# Altium PCB PCB_TTL.PcbDoc
Units mil, origin at the board's own origin, x right, y up, seen from the top; angles counter-clockwise.
Board outline 6000 x 4000 mil, 2 copper layers (Top Layer, Bottom Layer); 60 components, 136 nets, 462 pads, 29 vias.
Unrouted connection lines stored in the file: 2.
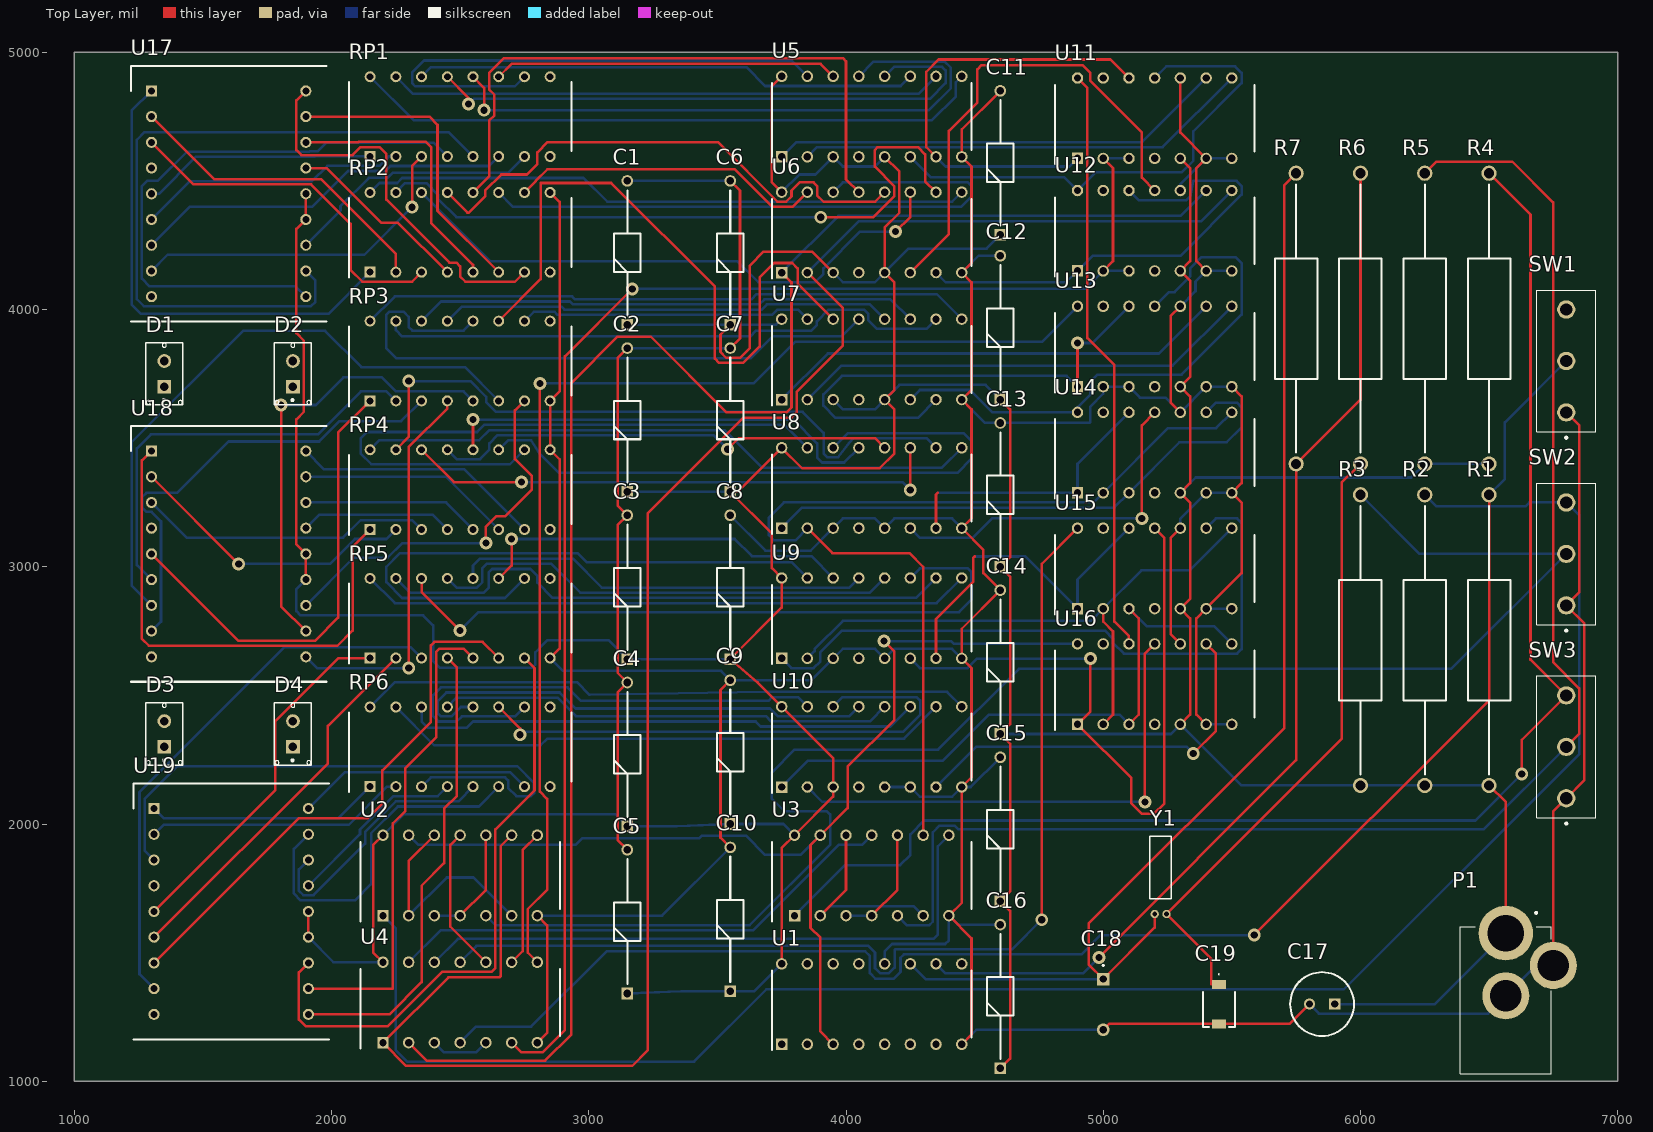
[diagram p0: Top Layer view]
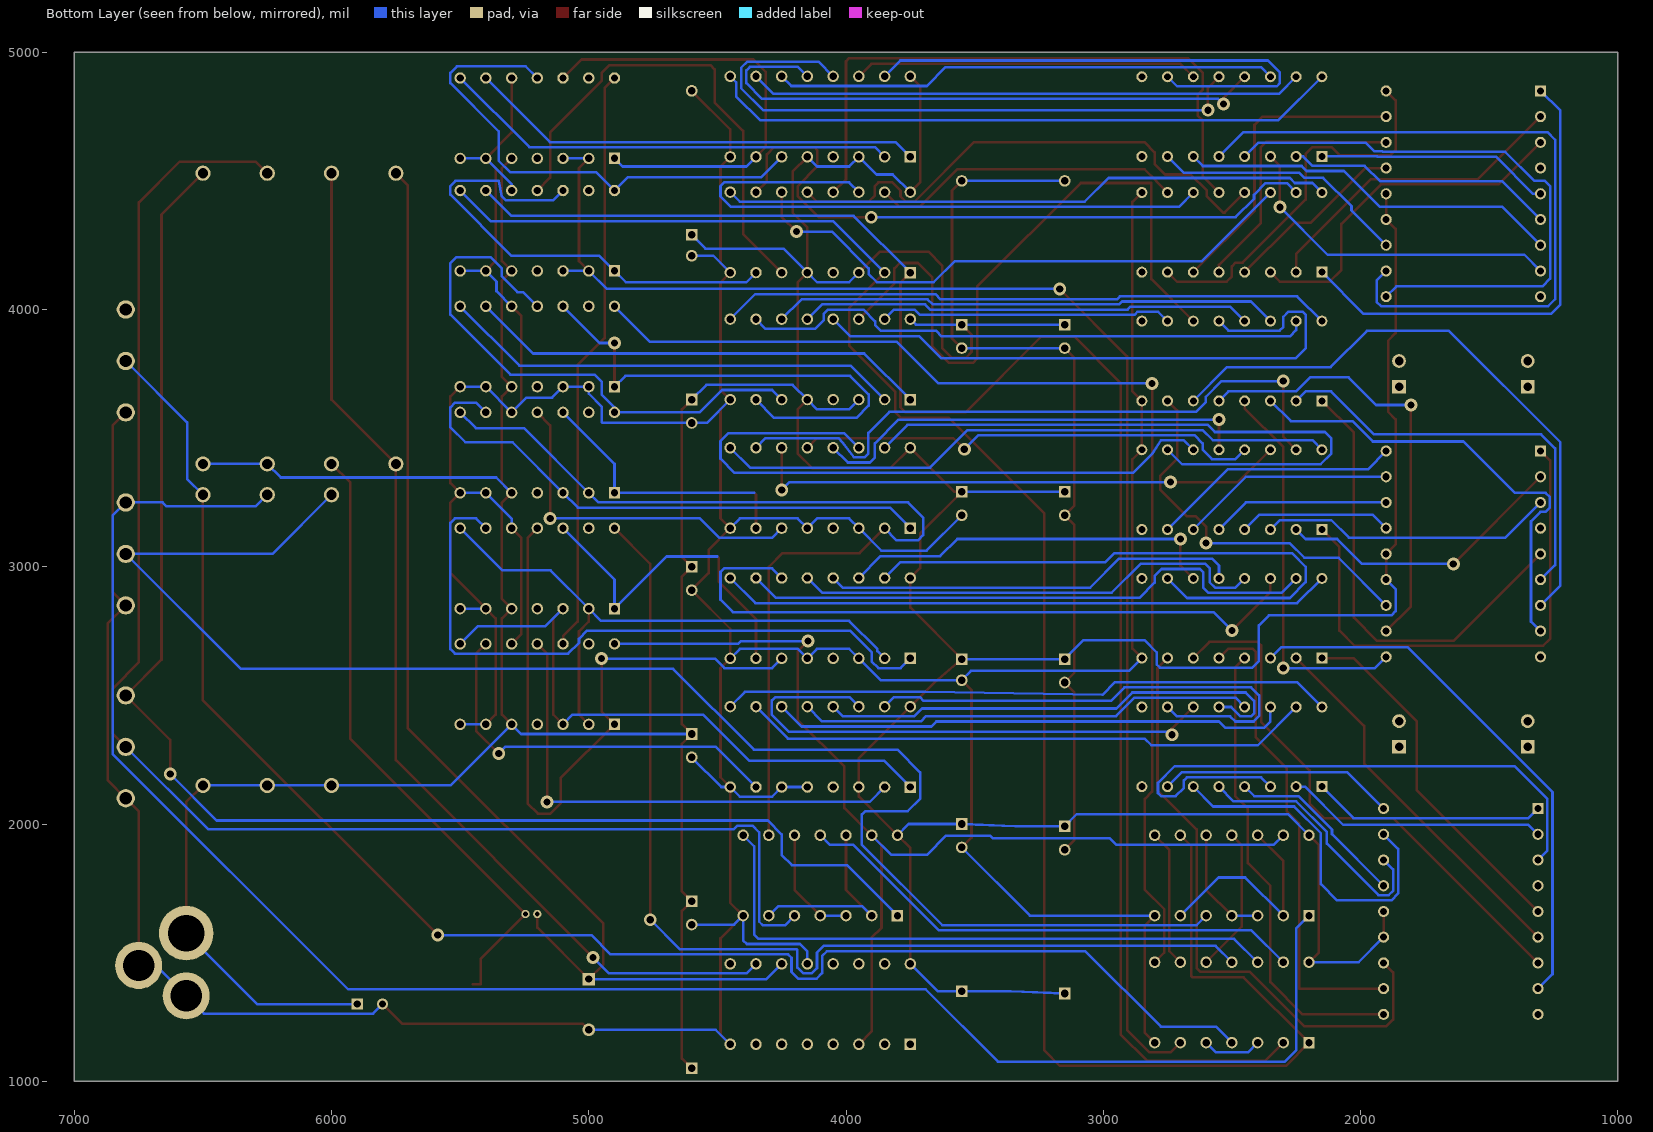
[diagram p1: Bottom Layer view, seen from below]

## Layer stack, top to bottom
Top Solder: solder mask 0.4, Solder Resist, Dk 3.5
Top Layer: signal copper 1.4
Dielectric 1: dielectric 12.6, FR-4, Dk 4.8
Bottom Layer: signal copper 1.4
Bottom Solder: solder mask 0.4, Solder Resist, Dk 3.5

## Board outline
1000,1000 7000,1000 7000,5000 1000,5000

## Design rules (kind name [scope] priority, off if disabled: settings)
Clearance [All] p1: gap=10 ignorepadtopadclearanceinfootprint=FALSE
PolygonConnect [All] p1: connectstyle=Relief reliefconductorwidth=10 reliefentries=4 polygonreliefangle="90 Angle" airgapwidth=10
RoutingVias [All] p1: holewidth=28 width=50 viastyle="Through Hole" minholewidth=28 minwidth=50 maxholewidth=28 maxwidth=50
SolderMaskExpansion [All] p1: expansion=0 istentingtop=FALSE
SupplyNets "Schematic Supply Nets_1" [InNet('GND')] p1: voltage=0.000
SupplyNets "Schematic Supply Nets" [InNet('VCC')] p2: voltage=0.000
Width [All] p1: maxlimit=10 minlimit=10 preferedwidth=10
30 further rules are at their usual default settings.

## Components (designator, comment, footprint, x,y, rotation, side; value= is the part's Value field where it differs from the comment)
C1 "100nF" CAPPA1420W55L380D260 3150,3940.94 r90 top
C2 "100nF" CAPPA1420W55L380D260 3150,3290.94 r90 top
C3 "100nF" CAPPA1420W55L380D260 3150,2640.94 r90 top
C4 "100nF" CAPPA1420W55L380D260 3150,1990.94 r90 top
C5 "100nF" CAPPA1420W55L380D260 3150,1340.94 r90 top
C6 "100nF" CAPPA1420W55L380D260 3550,3940.94 r90 top
C7 "100nF" CAPPA1420W55L380D260 3550,3290.94 r90 top
C8 "100nF" CAPPA1420W55L380D260 3550,2640.94 r90 top
C9 "100nF" CAPPA1420W55L380D260 3550,2000 r90 top
C10 "100nF" CAPPA1420W55L380D260 3550,1350 r90 top
C11 "100nF" CAPPA1420W55L380D260 4600,4290.94 r90 top
C12 "100nF" CAPPA1420W55L380D260 4600,3650 r90 top
C13 "100nF" CAPPA1420W55L380D260 4600,3000 r90 top
C14 "100nF" CAPPA1420W55L380D260 4600,2350 r90 top
C15 "100nF" CAPPA1420W55L380D260 4600,1700 r90 top
C16 "100nF" CAPPA1420W55L380D260 4600,1050 r90 top
C17 "100nF" CAPPRD250W52D630H1250 5900,1300 r180 top
C18 "12pF" FG28 5000,1396.85 r270 top
C19 "5-30pF" JZ300 5450,1300 r270 top
D1 "LED" LED_SSL-LX4673GD-LA20 1350,3750 r90 top
D2 "LED" LED_SSL-LX4673GD-LA20 1850,3750 r90 top
D3 "LED" LED_SSL-LX4673GD-LA20 1350,2350 r90 top
D4 "LED" LED_SSL-LX4673GD-LA20 1850,2350 r90 top
P1 "5V" KLDX0202A 6564.96,1575.98 r90 top
R1 "4.7K" RESAD2870W80L1190D420 6500,2150 r90 top
R2 "4.7k" RESAD2870W80L1190D420 6250,2150 r90 top
R3 "4.7k" RESAD2870W80L1190D420 6000,2150 r90 top
R4 "4.7k" RESAD2870W80L1190D420 6500,3400 r90 top
R5 "4.7k" RESAD2870W80L1190D420 6250,3400 r90 top
R6 "330K" RESAD2870W80L1190D420 6000,4529.92 r270 top
R7 "15M" RESAD2870W80L1190D420 5750,3400 r90 top
RP1 "R_Pack08" DIP787W49P254L2197H469Q16N 2500,4750 r90 top
RP2 "R_Pack08" DIP787W49P254L2197H469Q16N 2500,4300 r90 top
RP3 "R_Pack08" DIP787W49P254L2197H469Q16N 2500,3800 r90 top
RP4 "R_Pack08" DIP787W49P254L2197H469Q16N 2500,3300 r90 top
RP5 "R_Pack08" DIP787W49P254L2197H469Q16N 2500,2800 r90 top
RP6 "R_Pack08" DIP787W49P254L2197H469Q16N 2500,2300 r90 top
SW1 "Seconden" SS0750301F040P1A 6800,3600 r90 top
SW2 "Minuten" SS0750301F040P1A 6800,2850 r90 top
SW3 "Uren" SS0750301F040P1A 6800,2100 r90 top
U1 "74HCT4060" DIP794W53P254L1930H508Q16N 4100,1300 r90 top
U2 "74LS00" DIP794W53P254L1930H508Q14N 2500,1800 r90 top
U3 "74LS00" DIP794W53P254L1930H508Q14N 4100,1800 r90 top
U4 "74LS00" DIP794W53P254L1930H508Q14N 2500,1306.3 r90 top
U5 "74LS47" DIP794W53P254L1930H508Q16N 4100,4750 r90 top
U6 "74LS47" DIP794W53P254L1930H508Q16N 4100,4300 r90 top
U7 "74LS47" DIP794W53P254L1930H508Q16N 4100,3806.3 r90 top
U8 "74LS47" DIP794W53P254L1930H508Q16N 4100,3306.3 r90 top
U9 "74LS47" DIP794W53P254L1930H508Q16N 4100,2800 r90 top
U10 "74LS47" DIP794W53P254L1930H508Q16N 4100,2300 r90 top
U11 "74LS90" DIP794W53P254L1930H508Q14N 5200,4743.7 r90 top
U12 "74LS90" DIP794W53P254L1930H508Q14N 5200,4306.3 r90 top
U13 "74LS90" DIP794W53P254L1930H508Q14N 5200,3856.3 r90 top
U14 "74LS90" DIP794W53P254L1930H508Q14N 5200,3443.7 r90 top
U15 "74LS90" DIP794W53P254L1930H508Q14N 5200,2993.7 r90 top
U16 "74LS90" DIP794W53P254L1930H508Q14N 5200,2543.7 r90 top
U17 "DA56-11SRWA" DIPS1524W50P254L2500H825Q18N 1300,4850 r0 top
U18 "DA56-11SRWA" DIPS1524W50P254L2500H825Q18N 1300,3450 r0 top
U19 "DA56-11SRWA" DIPS1524W50P254L2500H825Q18N 1310,2060 r0 top
Y1 "32768Hz" XTAL_AB26T-32.768KHZ 5223.03,1650 r270 top

## Footprints (in the part's own frame and the unit in brackets; to place one, negate y for a bottom-side part, rotate by r counter-clockwise, add the part's x,y. Pads: shape width x height; smd on the part's side, far side on the other; paste and mask are expansions set on the pad)
CAPPA1420W55L380D260 [mm]
  rect 1.15x1.15 / inner round 1.15 / far side rect 1.15x1.15 hole 0.75: 1(0,0)
  round 1.15 hole 0.75: 2(14.2,0)
  silkscreen extent 0.92,-1.3 13.27,1.3
CAPPRD250W52D630H1250 [mm]
  rect 1.1x1.1 / inner round 1.1 / far side rect 1.1x1.1 hole 0.7: 1(0,0)
  round 1.1 hole 0.7: 2(2.5,0)
  silkscreen extent -1.9,-3.15 4.4,3.15
DIP787W49P254L2197H469Q16N [mm]
  rect 1.088x1.088 / inner round 1.088 / far side rect 1.088x1.088 hole 0.688: 1(-3.935,8.89)
  round 1.088 hole 0.688: 2(-3.935,6.35) 3(-3.935,3.81) 4(-3.935,1.27) 5(-3.935,-1.27) 6(-3.935,-3.81) 7(-3.935,-6.35) 8(-3.935,-8.89) 9(3.935,-8.89) 10(3.935,-6.35) 11(3.935,-3.81) 12(3.935,-1.27) 13(3.935,1.27) 14(3.935,3.81) 15(3.935,6.35) 16(3.935,8.89)
  silkscreen extent -4.48,-10.98 3.41,10.98
DIP794W53P254L1930H508Q14N [mm]
  rect 1.13x1.13 / inner round 1.13 / far side rect 1.13x1.13 hole 0.73: 1(-3.97,7.62)
  round 1.13 hole 0.73: 2(-3.97,5.08) 3(-3.97,2.54) 4(-3.97,0) 5(-3.97,-2.54) 6(-3.97,-5.08) 7(-3.97,-7.62) 8(3.97,-7.62) 9(3.97,-5.08) 10(3.97,-2.54) 11(3.97,0) 12(3.97,2.54) 13(3.97,5.08) 14(3.97,7.62)
  silkscreen extent -4.54,-9.84 3.3,9.84
DIP794W53P254L1930H508Q16N [mm]
  rect 1.13x1.13 / inner round 1.13 / far side rect 1.13x1.13 hole 0.73: 1(-3.97,8.89)
  round 1.13 hole 0.73: 2(-3.97,6.35) 3(-3.97,3.81) 4(-3.97,1.27) 5(-3.97,-1.27) 6(-3.97,-3.81) 7(-3.97,-6.35) 8(-3.97,-8.89) 9(3.97,-8.89) 10(3.97,-6.35) 11(3.97,-3.81) 12(3.97,-1.27) 13(3.97,1.27) 14(3.97,3.81) 15(3.97,6.35) 16(3.97,8.89)
  silkscreen extent -4.54,-9.84 3.3,9.84
DIPS1524W50P254L2500H825Q18N [mm]
  rect 1.1x1.1 / inner round 1.1 / far side rect 1.1x1.1 hole 0.7: 1(0,0)
  round 1.1 hole 0.7: 2(0,-2.54) 3(0,-5.08) 4(0,-7.62) 5(0,-10.16) 6(0,-12.7) 7(0,-15.24) 8(0,-17.78) 9(0,-20.32) 10(15.24,-20.32) 11(15.24,-17.78) 12(15.24,-15.24) 13(15.24,-12.7) 14(15.24,-10.16) 15(15.24,-7.62) 16(15.24,-5.08) 17(15.24,-2.54) 18(15.24,0)
  silkscreen extent -2.03,-22.79 17.27,2.47
FG28 [mm]
  rect 1.25x1.25 hole 0.7: 1(0,0)
  round 1.25 hole 0.7: 2(5,0)
  silkscreen extent -1.4,-0.05 -1.3,0.05, body extent -0.29,-1.25 5.21,1.25, height 6.48
JZ300 [mm]
  rect 0.9x1.4 smd: 1(-1.95,0) 2(1.95,0)
  silkscreen extent -3,-1.6 2.25,1.6
KLDX0202A [mm]
  round 5.385 hole 3.59: 1(0,0)
  round 4.65 hole 3.1: 2(-6.2,0) 3(-3.2,-4.7)
  silkscreen extent -13.9,-4.5 2.1,4.5
LED_SSL-LX4673GD-LA20 [mm]
  rect 1.358x1.358 / inner round 1.358 / far side rect 1.358x1.358 hole 0.85 mask+0.102: A(-1.27,0)
  round 1.358 hole 0.85 mask+0.102: C(1.27,0)
  silkscreen extent -3.07,-1.82 3.08,1.82
RESAD2870W80L1190D420 [mm]
  round 1.5 hole 1: 1(0,0) 2(28.7,0)
  silkscreen extent 1.1,-2.1 27.6,2.1
SS0750301F040P1A [mm]
  round 1.8 hole 1.2: 1(0,0) 2(5.08,0) 3(10.16,0)
  silkscreen extent -2.6,-2.9 12.08,2.9
XTAL_AB26T-32.768KHZ [mm]
  round 0.81 hole 0.46 mask+0.102: 1(0,0.585) 2(0,-0.585)
  silkscreen extent -7.7,-1.05 -1.5,1.05, body extent -7.7,-1.05 0.13,1.05, height 2.1

## Part data
C1 C2 C3 C4 C5 C6 C7 C8 C9 C10 C11 C12 C13 C14 C15 C16 C18: library part C
C17: library part CP1
C19: library part CTRIM
P1: library part Barrel_Jack_Switch
R1 R2 R3 R4 R5 R6 R7: library part R
SW1 SW2 SW3: library part SW_SPDT_Omron
Y1: library part Crystal

## Via types
v1: diameter 50, hole 28, Top Layer to Bottom Layer, 29 vias

## Nets (pads, with @x,y where several pads share a name; then routed paths per layer and width w, separated by ;. In a path a pad name is that pad's centre, name@x,y a point inside that pad or via, vN(x,y) a via of type N, cw(c..) or ccw(c..) an arc to the next point about the centre after c; other vN are vias at no path point)
GND: C8.2 C9.2 C10.2 C11.2 C12.2 C13.2 C14.2 C15.2 C16.2 C17.2 C18.2 C19.2 P1.2 P1.3 RP2.9 RP3.8 RP4.9 RP5.8 SW1.1 SW2.1 SW3.1 U1.8 U1.12 U2.7 U3.7 U4.7 U5.8 U6.8 U7.8 U8.3 U8.5 U8.8 U9.3 U9.5 U9.8 U10.5 U10.6 U10.8 U11.6 U11.7 U11.10 U12.6 U12.7 U12.10 U13.2 U13.3 U13.6 U13.7 U13.10 U14.6 U14.7 U14.10 U15.6 U15.7 U15.10 U16.6 U16.7 U16.10 | length 22379.7
  Top Layer w10: U4.7 2838,1188 2838,1605.7 U2.7 ; RP5.8 2887,2682.08 2887,3417.92 RP4.9 RP3.8 2887,3682.08 2887,4417.92 RP2.9 ; C10.2 3512,1947.06 3512,2521.06 C9.2 ; U1.8 4488,1181.7 4488,1555.7 U3.7 4450,1693.7 U10.8 4488,2181.7 4488,2605.7 U9.8 4450,2759.06 C14.2 4534,2975.06 4534,3066 U8.8 4488,3188 4488,3612 U7.8 4488,3688 4488,4105.7 U6.8 4488,4181.7 4488,4555.7 U5.8 4450,4700 C11.2 ; C18.2 5023.23,1223.23 C19.2 5724.8,1223.23 C17.2 ; U16.10 5262,2738 5262,3112 U15.10 ; U14.10 5262,3638 5262,3974.6 U13.10 ; U11.10 5300,4687.4 U11.6 5362,4549.4 5362,4188 U12.6 ; U16.6 5362,2425.4 5362,2799.4 U15.6 5538,2975.4 5538,3249.4 U14.7 5538,3325.4 5538,3662 U13.7 ; P1.3 6750,2050 SW3.1 6870.43,2170.43 6870.43,2779.57 SW2.1 6851,2901 6851,3549 SW1.1
  Bottom Layer w10: U2.7 3284.64,1643.7 C10.2 ; RP5.8 2900.08,2595 3514.06,2595 C9.2 3865.36,2559.06 U9.3 3987.3,2681 4112.7,2681 U9.5 4187.3,2681 4412.7,2681 U9.8 ; C8.2 3687,3063 3863,3063 U8.3 3988,3188 4112,3188 U8.5 4188,3188 4412,3188 U8.8 ; U1.12 4150,1504.15 4179.4,1533.55 4385.55,1533.55 4400,1548 U3.7 4434.64,1609.06 C16.2 ; U10.5 U10.6 4287.7,2106 4412.3,2106 U10.8 4484.64,2143.7 C15.2 ; U1.8 4506.3,1200 C18.2 ; U7.8 4540.94,3559.06 C13.2 4947.06,3559.06 4950,3562 4950,3622.75 5000,3672.75 U13.2 U13.3 5142.75,3657.25 5242.75,3657.25 U14.10 U13.6 U13.7 ; U6.8 4515.36,4209.06 C12.2 ; U15.10 5300,3187.4 U14.6 U14.7 ; U13.10 5358.64,4071.24 5358.64,4108.64 U12.6 U12.7 ; U12.10 5300,4487.4 U11.6 U11.7 ; U16.6 U16.7 ; U15.6 U15.7 ; C17.2 5838.57,1263 6496.07,1263 P1.2 6683.07,1450 P1.3
NetC1_2: C1.2 C2.2 C3.2 C4.2 C5.2 C6.2 C7.2 | length 3525.9
  Top Layer w10: C5.2 3112,1938 3112,2512 C4.2 3112,2588 3112,3162 C3.2 3112,3238 3112,3812 C2.2 ; C7.2 3588,3888 3588,4462 C6.2
  Bottom Layer w10: C2.2 C7.2 ; C1.2 C6.2
NetC18_1: C18.1 R7.2 U1.11 Y1.2 | length 4601.6
  Top Layer w10: Y1.2 5200,1596.85 C18.1 4943,1453.85 4943,1612.8 5704,2373.8 5704,4483.92 R7.2
  Bottom Layer w10: U1.11 4309.45,1396.85 C18.1
NetC19_1: C19.1 R6.2 Y1.1 | length 2437.6
  Top Layer w10: C19.1 5420,1376.77 5420,1476.06 Y1.1 5927,2330.94 5927,3327 R6.2
NetD1_1: RP2.8
NetD2_1: RP3.9
NetD3_1: RP4.8
NetD4_1: RP5.9
NetR1_2: R1.2 SW1.2 U4.4 | length 6154.2
  Top Layer w10: v1(5587,1568) 6500,2481 R1.2
  Bottom Layer w10: U4.4 2562,1212 2776,1212 3069.12,1505.12 4074.88,1505.12 4092.75,1487.25 4092.75,1420 4113.7,1399.05 4186.3,1399.05 4212,1424.75 4212,1480 4225.55,1493.55 4914.7,1493.55 4989.16,1568 v1(5587,1568) ; R1.2 6561,3340.92 6561,3561 SW1.2
NetR2_2: R2.2 SW2.3 U2.1 | length 7232.4
  Bottom Layer w10: U2.1 2250,1593.7 2250,1120 2294,1076 3409,1076 3690,1357 5935,1357 6851,2273 6851,3199 SW2.3 6657,3250 6642,3235 6294.92,3235 R2.2
NetR3_2: R3.2 SW2.2 U2.5 | length 6290.1
  Bottom Layer w10: U2.5 2637.25,1606.45 3625.45,1606.45 3938,1919 3938,2037 3925,2050 3760,2050 3712,2098 3712,2201 3800,2289 4358,2289 4671.75,2602.75 6352.75,2602.75 SW2.2 6229.92,3050 R3.2
NetR4_2: R4.2 SW3.3 U3.1 | length 5633.6
  Top Layer w10: R4.2 6661,4368.92 6661,2639 SW3.3 6627,2327 v1(6627,2194)
  Bottom Layer w10: U3.1 3996.3,1840 4210,1840 4250,1880 4250,1960 4303.55,2013.55 6446.55,2013.55 v1(6627,2194)
NetR5_2: R5.2 SW3.2 U3.5 | length 5881.3
  Top Layer w10: R5.2 6295.08,4575 6590,4575 6749,4416 6749,2629 6850.43,2527.57 6850.43,2350.43 SW3.2
  Bottom Layer w10: U3.5 4237.7,1606 4323.25,1606 4337.25,1620 4337.25,1967.79 4363,1993.55 4422.45,1993.55 4437,1979 6479,1979 SW3.2
NetR6_1: R6.1 R7.1 U1.10 | length 4144.3
  Top Layer w10: v1(4983,1481) 5750,2248 R7.1 6000,3650 R6.1
  Bottom Layer w10: U1.10 4387.3,1419 4921,1419 v1(4983,1481)
NetRP1_1: RP1.1 U17.5 | length 910.1
  Bottom Layer w10: U17.5 1328.51,4450 1471.85,4593.35 1934.01,4593.35 1935.75,4595.08 RP1.1
NetRP1_2: RP1.2 U17.6 | length 1051.5
  Bottom Layer w10: U17.6 1448,4498 1923,4498 1983.66,4558.66 2186.42,4558.66 2222.84,4595.08 RP1.2
NetRP1_3: RP1.3 U17.8 | length 1328.1
  Top Layer w10: v1(2313,4398) 2313,4558.08 RP1.3
  Bottom Layer w10: U17.8 1363,4213 2128,4213 v1(2313,4398)
NetRP1_4: RP1.4 U17.10 | length 2305.3
  Bottom Layer w10: U17.10 1860,4090 1293,4090 1263,4120 1263,4480 1283,4500 1324,4500 1437.35,4613.35 1913.35,4613.35 1916,4616 1947,4616 1980,4649 2396.08,4649 RP1.4
NetRP1_5: RP1.5 U17.11 | length 2826.3
  Bottom Layer w10: U17.11 1937,4113 1937,4030 1920,4013 1270,4013 1243,4040 1243,4660 1273,4690 2455.08,4690 RP1.5
NetRP1_6: RP1.6 U17.7 | length 1492.9
  Bottom Layer w10: U17.7 1450,4400 1925.65,4400 2064.31,4538.66 2209.26,4538.66 2228.6,4558 2612.92,4558 RP1.6
NetRP1_7: RP1.7 U17.12 | length 1002.9
  Bottom Layer w10: U17.12 2035,4385 2035,4402 2145,4512 2218.29,4512 2237.63,4531.34 2686.26,4531.34 RP1.7
NetRP1_10: RP1.10 U5.15 | length 2080.3
  Bottom Layer w10: RP1.10 2713.08,4868 2325,4868 2313,4880 2313,4921 2360,4968 3788.3,4968 U5.15
NetRP1_11: RP1.11 U5.14 | length 1340.9
  Top Layer w10: RP1.11 2700.08,4955 3901.3,4955 U5.14
NetRP1_12: RP1.12 U5.13 | length 2467.9
  Top Layer w10: RP1.12 2593,4861.92 v1(2593,4775)
  Bottom Layer w10: v1(2593,4775) 4322.25,4775 4407.25,4860 4407.25,4940 4383.7,4963.55 4107.25,4963.55 U5.13
NetRP1_13: RP1.13 U5.12 | length 2336.4
  Top Layer w10: RP1.13 2533,4821.92 v1(2533,4799)
  Bottom Layer w10: v1(2533,4799) 2553,4819 4326.25,4819 4387.25,4880 4387.25,4930 4373.7,4943.55 4187.25,4943.55 U5.12
NetRP1_14: RP1.14 U5.11 | length 1961
  Bottom Layer w10: RP1.14 2387.08,4942 3613,4942 3686,4869 4212.7,4869 U5.11
NetRP1_15: RP1.15 U5.10 | length 2154.6
  Bottom Layer w10: RP1.15 2315.28,4839.65 4283.35,4839.65 U5.10
NetRP1_16: RP1.16 U5.9 | length 2473.3
  Bottom Layer w10: RP1.16 2319.92,4735 4333.19,4735 4427.25,4829.05 4427.25,4883.55 U5.9
NetRP2_1: RP2.1 U17.1 | length 1871.4
  Bottom Layer w10: U17.1 1223,4773 1223,4020 1260,3983 1987.92,3983 RP2.1
NetRP2_2: RP2.2 U17.2 | length 1242.1
  Top Layer w10: U17.2 1543.35,4506.65 1959.35,4506.65 2250,4216 RP2.2
NetRP2_3: RP2.3 U17.3 | length 1394.7
  Top Layer w10: U17.3 1463.35,4486.65 1920.35,4486.65 2074,4333 2074,4154 2120,4108 2312.92,4108 RP2.3
NetRP2_4: RP2.4 U17.15 | length 717.7
  Top Layer w10: U17.15 1981,4550 2193,4338 2257.08,4338 RP2.4
NetRP2_5: RP2.5 U17.16 | length 1049.5
  Top Layer w10: U17.16 2103.5,4650 2105,4651.5 2366.5,4651.5 2387,4631 2387,4336.35 2550,4173.35 RP2.5
NetRP2_6: RP2.6 U17.17 | length 1196.8
  Top Layer w10: U17.17 2380,4750 2412,4718 2412,4383.08 RP2.6
NetRP2_7: RP2.7 U17.18 | length 1513.8
  Top Layer w10: U17.18 1863,4813 1863,4620 1883,4600 2081.5,4600 2113,4631.5 2187,4631.5 2213,4605.5 2213,4427 2458,4182 2486,4182 2500,4168 2500,4128 2520,4108 2712.92,4108 RP2.7
NetRP2_10: RP2.10 U6.15 | length 1222.4
  Top Layer w10: RP2.10 2793.58,4498.5 2793.58,4500 2838.58,4545 3567.75,4545 3713.7,4399.05 3792.75,4399.05 U6.15
NetRP2_11: RP2.11 U6.14 | length 2477.6
  Bottom Layer w10: RP2.11 2705.92,4399 4447,4399 4488,4440 4488,4480 4474,4494 3987.7,4494 U6.14
NetRP2_12: RP2.12 U6.13 | length 2452.7
  Top Layer w10: RP2.12 2613,4517.92 2613,4735 2633,4755 2633,4835 2613,4855 2613,4920 2670,4977 3988,4977 4000,4965 4000,4506.3 U6.13
NetRP2_13: RP2.13 U6.12 | length 2093.2
  Top Layer w10: RP2.13 2527.92,4377 2534,4377 2597,4440 2597,4462 2660,4525 2760,4525 2800,4565 2800,4611 2840,4651 3501.75,4651 3733.7,4419.05 3767.05,4419.05 3788,4440 3788,4462 3820,4494 3874,4494 3888,4480 3888,4444 3913,4419 4112.7,4419 U6.12
NetRP2_14: RP2.14 U6.11 | length 2258.9
  Top Layer w10: v1(4193,4303) 4250,4360 U6.11
  Bottom Layer w10: RP2.14 2616.92,4188 3577,4188 3659,4106 3880,4106 3912,4138 3912,4160 4055,4303 v1(4193,4303)
NetRP2_15: RP2.15 U6.10 | length 2637.5
  Top Layer w10: v1(3902,4359) 4106.25,4359 4187.25,4440 4187.25,4480 4112,4555.25 4112,4620 4123,4631 4280,4631 4308,4603 4308,4498.3 U6.10
  Bottom Layer w10: RP2.15 2286.42,4491.34 2368.66,4491.34 2414,4446 2414,4430 2485,4359 v1(3902,4359)
NetRP2_16: RP2.16 U6.9 | length 2377.1
  Bottom Layer w10: RP2.16 2187.08,4492 2255.44,4492 2274.78,4511.34 2979.66,4511.34 3072,4419 4412.7,4419 U6.9
NetRP3_1: RP3.1 U18.5 | length 1796.9
  Top Layer w10: U18.5 1637,2713 1937,2713 2026,2802 2026,3521.08 RP3.1
NetRP3_2: RP3.2 U18.6 | length 1647.6
  Bottom Layer w10: U18.6 1243.35,3006.65 1243.35,3460.35 1298,3515 1947,3515 2114,3682 2213.08,3682 RP3.2
NetRP3_3: RP3.3 U18.8 | length 1819.8
  Bottom Layer w10: U18.8 1337,2787 1337,3176.35 1300,3213.35 1280,3213.35 1263.35,3230 1263.35,3270.35 1280,3287 1400,3287 1600,3487 1952,3487 2031,3566 2270.92,3566 RP3.3
NetRP3_4: RP3.4 U18.10 | length 1519.4
  Top Layer w10: v1(2300,2606) 2300,3465 2450,3615 RP3.4
  Bottom Layer w10: U18.10 1944,2606 v1(2300,2606)
NetRP3_5: RP3.5 U18.11 | length 1746.7
  Top Layer w10: v1(1804,3629) 1804,2846 U18.11
  Bottom Layer w10: v1(1804,3629) 1939,3629 2046,3736 2195.5,3736 2250,3681.5 2513.58,3681.5 RP3.5
NetRP3_6: RP3.6 U18.7 | length 2384.9
  Bottom Layer w10: U18.7 1223,2927 1223,3484 1656,3917 1975,3917 2116,3776 2519.08,3776 RP3.6
NetRP3_7: RP3.7 U18.12 | length 1490.6
  Top Layer w10: v1(2600,3092) 2600,3156 2640,3196 2675,3196 2779,3300 2779,3353 2713,3419 2713,3608.08 RP3.7
  Bottom Layer w10: U18.12 2085.07,3035.07 2218.07,3035.07 2275,3092 v1(2600,3092)
NetRP3_10: RP3.10 U7.15 | length 1144.3
  Bottom Layer w10: RP3.10 2786.42,3991.34 2866.66,3991.34 2879,3979 3713,3979 3733.84,3999.84 3812.75,3999.84 U7.15
NetRP3_11: RP3.11 U7.14 | length 2638.4
  Top Layer w10: RP3.11 2813,4117.92 2813,4491 2814,4492 3087,4492 3490,4089 3490,3809.36 3507,3792.36 3600.36,3792.36 3664,3856 3664,4125 3720,4181 3791,4181 3812,4160 3812,4100.6 U7.14
NetRP3_12: RP3.12 U7.13 | length 2458.7
  Bottom Layer w10: RP3.12 2513.08,3918 2314,3918 2300,3932 2300,3972 2280,3992 2225,3992 2213,3980 2213,3849 2252,3810 3629,3810 3715.85,3896.85 3984.25,3896.85 U7.13
NetRP3_13: RP3.13 U7.12 | length 1760.1
  Bottom Layer w10: RP3.13 2506.42,4011.34 2893.66,4011.34 2905.16,3999.84 3672.75,3999.84 3692.75,4019.84 4092.75,4019.84 U7.12
NetRP3_14: RP3.14 U7.11 | length 1976.7
  Bottom Layer w10: RP3.14 2426.42,4031.34 2926.42,4031.34 2937.91,4019.84 3662.6,4019.84 3682.6,4039.84 4172.75,4039.84 U7.11
NetRP3_15: RP3.15 U7.10 | length 2257.2
  Bottom Layer w10: RP3.15 2250,3920 2274,3896 3628,3896 3649,3917 3864,3917 3887,3940 3887,3954 3932.84,3999.84 4070,3999.84 4087.25,3982.6 4087.25,3957.75 4120,3925 4312.4,3925 U7.10
NetRP3_16: RP3.16 U7.9 | length 2393.3
  Bottom Layer w10: RP3.16 2246.42,4051.34 2934.92,4051.34 2946.42,4039.84 3632.75,4039.84 3652.75,4059.84 4352.75,4059.84 U7.9
NetRP4_1: RP4.1 U18.1 | length 2021.2
  Top Layer w10: U18.1 1263,3413 1263,2720 1290,2693 2023,2693 2082,2752 2082,3077.08 RP4.1
NetRP4_2: RP4.2 U18.2 | length 1146
  Top Layer w10: U18.2 v1(1639,3011)
  Bottom Layer w10: v1(1639,3011) 1994,3011 2091,3108 2212.92,3108 RP4.2
NetRP4_3: RP4.3 U18.3 | length 1150.2
  Bottom Layer w10: U18.3 1437,3113 2045.09,3113 2113.58,3181.5 2313.58,3181.5 RP4.3
NetRP4_4: RP4.4 U18.15 | length 594.7
  Bottom Layer w10: U18.15 1951.5,3201.5 2393.58,3201.5 RP4.4
NetRP4_5: RP4.5 U18.16 | length 693.5
  Bottom Layer w10: U18.16 2445.08,3250 RP4.5
NetRP4_6: RP4.6 U18.17 | length 834.9
  Bottom Layer w10: U18.17 2445.08,3350 RP4.6
NetRP4_7: RP4.7 U18.18 | length 976.3
  Bottom Layer w10: U18.18 1971.5,3378.5 2516.57,3378.5 RP4.7
NetRP4_10: RP4.10 U8.15 | length 2532
  Bottom Layer w10: RP4.10 2693.58,3398.5 2154.5,3398.5 2113,3440 2113,3499 2138,3524 2566.24,3524 2593.58,3551.34 3761.26,3551.34 U8.15
NetRP4_11: RP4.11 U8.14 | length 2578
  Bottom Layer w10: RP4.11 2686.42,3491.34 2775.66,3491.34 2809,3440 2883.65,3365.35 4433.35,3365.35 4488,3420 4488,3489 4457.16,3519.84 4007.25,3519.84 U8.14
NetRP4_12: RP4.12 U8.13 | length 1742.2
  Top Layer w10: RP4.12 v1(2550,3572)
  Bottom Layer w10: v1(2550,3572) 3796,3572 3888,3480 3888,3424.75 3907.4,3405.35 3992.75,3405.35 U8.13
NetRP4_13: RP4.13 U8.12 | length 1824
  Top Layer w10: v1(3540,3457) 3583,3500 4112.6,3500 U8.12
  Bottom Layer w10: RP4.13 2486.42,3418.5 2577.09,3418.5 2613.58,3455 2613.58,3480 2644.92,3511.34 3485.66,3511.34 v1(3540,3457)
NetRP4_14: RP4.14 U8.11 | length 2128.2
  Top Layer w10: RP4.14 2475.92,3329 v1(2739,3329) ; v1(4250,3299) U8.11
  Bottom Layer w10: v1(2739,3329) 4220,3329 v1(4250,3299)
NetRP4_15: RP4.15 U8.10 | length 2570.8
  Top Layer w10: RP4.15 2300,3504.92 v1(2300,3722)
  Bottom Layer w10: v1(2300,3722) 2540,3722 2601,3661 2601,3640 2639,3602 3830.75,3602 3912.75,3520 3912.75,3440 3927.4,3425.35 3969.35,3425.35 4013,3482.84 4030,3499.84 4312.75,3499.84 U8.10
NetRP4_16: RP4.16 U8.9 | length 2424.1
  Bottom Layer w10: RP4.16 2187.08,3492 2574.24,3492 2613.58,3531.34 3526.77,3531.34 3672.75,3385.35 4372.75,3385.35 U8.9
NetRP5_1: RP5.1 U19.5 | length 1405
  Top Layer w10: U19.5 1782,2132 1782,2400 2027.08,2645.08 RP5.1
NetRP5_2: RP5.2 U19.6 | length 1474.4
  Top Layer w10: U19.6 1986,2236 1986,2381.08 RP5.2
NetRP5_3: RP5.3 U19.8 | length 2134.9
  Bottom Layer w10: U19.8 1253.35,1416.65 1253.35,2124.33 1816.02,2687 2308.08,2687 RP5.3
NetRP5_4: RP5.4 U19.10 | length 1823.9
  Top Layer w10: U19.10 2225,1260 2350,1385 2350,1760 2438,1848 2438,2060 2487,2109 2487,2608.08 RP5.4
NetRP5_5: RP5.5 U19.11 | length 1870.1
  Top Layer w10: U19.11 2237,1360 2238,1361 2238,2002 2287,2051 2287,2217 2406.42,2336.42 2406.42,2668.42 2420,2682 2513.08,2682 RP5.5
NetRP5_6: RP5.6 U19.7 | length 2132.5
  Top Layer w10: U19.7 1872,2022 2140,2022 2198,2080 2198,2208 2386.42,2396.42 2386.42,2694.42 2400,2708 2587.08,2708 RP5.6
NetRP5_7: RP5.7 U19.12 | length 2388.9
  Top Layer w10: U19.12 1873,1423 1873,1240 1900,1213 2218,1213 2430,1425 2622.25,1425 2637.25,1440 2637.25,1979.25 2789,2131 2789,2606.08 RP5.7
NetRP5_10: RP5.10 U9.15 | length 2352.1
  Bottom Layer w10: RP5.10 2673.58,2878.5 2274.5,2878.5 2213,2940 2213,3000 2264.81,3051.81 2957.68,3051.81 2991.49,3018 3788.3,3018 U9.15
NetRP5_11: RP5.11 U9.14 | length 1486.6
  Top Layer w10: RP5.11 2700,3004.92 v1(2700,3108)
  Bottom Layer w10: v1(2700,3108) 3567.14,3108 3633.98,3041.15 3865.15,3041.15 U9.14
NetRP5_12: RP5.12 U9.13 | length 1622.5
  Bottom Layer w10: RP5.12 2550,3004.21 2577.13,3031.34 2938.15,3031.34 3050.44,2919.05 4012.75,2919.05 U9.13
NetRP5_13: RP5.13 U9.12 | length 1855.7
  Bottom Layer w10: RP5.13 2486.42,2918.5 2565.09,2918.5 2586.42,2939.84 2586.42,2994.42 2603.34,3011.34 2854.66,3011.34 2966.95,2899.05 4092.75,2899.05 U9.12
NetRP5_14: RP5.14 U9.11 | length 2670.2
  Top Layer w10: RP5.14 2350,2902 v1(2500,2752)
  Bottom Layer w10: v1(2500,2752) 2572,2824 4440,2824 4488,2872 4488,2980 4474,2994 4287.7,2994 U9.11
NetRP5_15: RP5.15 U9.10 | length 2289.8
  Bottom Layer w10: RP5.15 2306.42,2898.5 2590.5,2898.5 2612,2920 2612,2979 2624.34,2991.34 2772.66,2991.34 2800,2964 2800,2938.5 2859.45,2879.05 4272.75,2879.05 U9.10
NetRP5_16: RP5.16 U9.9 | length 2380.4
  Bottom Layer w10: RP5.16 2246.42,2858.5 4352.2,2858.5 U9.9
NetRP6_1: RP6.1 U19.1 | length 905.9
  Bottom Layer w10: U19.1 1347,2023 2027.92,2023 RP6.1
NetRP6_2: RP6.2 U19.2 | length 1016.7
  Bottom Layer w10: U19.2 1347,1997 2067,1997 2215.08,2145.08 RP6.2
NetRP6_3: RP6.3 U19.3 | length 2390.9
  Bottom Layer w10: U19.3 1273.35,1896.65 1273.35,2097 1401.35,2225 2722,2225 2787,2160 2787,2120 2775,2108 2718.42,2108 2686.42,2140 2686.42,2170 2674.92,2181.5 2386.42,2181.5 RP6.3
NetRP6_4: RP6.4 U19.15 | length 709.9
  Bottom Layer w10: U19.15 2110.72,1960.72 2110.72,1978.52 2240.19,2108 2412.92,2108 RP6.4
NetRP6_5: RP6.5 U19.16 | length 1019.9
  Bottom Layer w10: U19.16 1873.35,1823.35 1873.35,1740 1890,1723.35 1930.35,1723.35 2131,1924 2131,1969.29 2249.71,2088 2492.92,2088 RP6.5
NetRP6_6: RP6.6 U19.17 | length 1360.1
  Bottom Layer w10: U19.17 1853.35,1903.35 1853.35,1730 1880,1703.35 2091.35,1703.35 2154,1766 2154,1964 2258,2068 2572.92,2068 RP6.6
NetRP6_7: RP6.7 U19.18 | length 922
  Bottom Layer w10: U19.18 2051.5,2201.5 2693.58,2201.5 RP6.7
NetRP6_10: RP6.10 U10.15 | length 1981.2
  Bottom Layer w10: RP6.10 2713.58,2418.5 2506.42,2418.5 2486.42,2398.5 2415.08,2398.5 2393.58,2420 2393.58,2500 2424.92,2531.34 2918,2531.34 2970.34,2479 3698.45,2479 3713,2493.55 3812.75,2493.55 U10.15
NetRP6_11: RP6.11 U10.14 | length 2144.2
  Top Layer w10: RP6.11 2733,2371.92 v1(2733,2347)
  Bottom Layer w10: v1(2733,2347) 2745.05,2359.05 4223.05,2359.05 4288,2424 4288,2480 4274.45,2493.55 3987.25,2493.55 U10.14
NetRP6_12: RP6.12 U10.13 | length 1908.5
  Bottom Layer w10: RP6.12 2502.42,2454.92 2466,2418.5 2425.08,2418.5 2413.58,2430 2413.58,2478.58 2446.34,2511.34 2886.66,2511.34 2949,2449 3704,2449 3733.95,2419.05 4012.75,2419.05 U10.13
NetRP6_13: RP6.13 U10.12 | length 1777
  Bottom Layer w10: RP6.13 2486.42,2491.34 2878,2491.34 2950.29,2419.05 3688.39,2419.05 3708.39,2399.05 4092.75,2399.05 U10.12
NetRP6_14: RP6.14 U10.11 | length 2016.1
  Bottom Layer w10: RP6.14 2350,2398.42 2373.58,2374.84 2526.42,2374.84 2550.09,2398.5 3648.94,2398.5 3668.39,2379.05 4172.75,2379.05 U10.11
NetRP6_15: RP6.15 U10.10 | length 2223.8
  Bottom Layer w10: RP6.15 2398.76,2306.16 2813,2306.16 2838.84,2332 4225.7,2332 U10.10
NetRP6_16: RP6.16 U10.9 | length 2384.2
  Bottom Layer w10: RP6.16 2246.42,2551.34 2954.21,2551.34 3003.55,2502 3692.75,2513.55 4392.75,2513.55 U10.9
NetU1_3: U1.3 U2.13 U3.13 U16.14 | length 4204.9
  Top Layer w10: U1.3 3900,1193.7 3900,1558 3862,1596 3862,1918.3 U3.13 4006,2062.3 4006,2223 4188,2405 4188,2671 v1(4148,2711)
  Bottom Layer w10: U2.13 2337.3,1919 2949,1919 2975,1945 3430,1945 3440,1955 3610.7,1955 3685.7,1880 3823.7,1880 U3.13 ; v1(4148,2711) 4408,2711 4419,2700 U16.14
NetU2_2: U2.2 U2.6 U2.12 | length 876.9
  Top Layer w10: U2.2 2300,1856.3 U2.12
  Bottom Layer w10: U2.2 2448.3,1792 2551.7,1792 U2.6
NetU2_3: U2.3 U2.4 U2.10 | length 454
  Top Layer w10: U2.4 2600,1743.7 U2.10
  Bottom Layer w10: U2.3 U2.4
NetU2_8: U2.8 U4.9 | length 535.1
  Top Layer w10: U4.9 2742.75,1505.35 2742.75,1899.05 U2.8
NetU2_9: U2.9 U4.1 U6.2 U12.8 | length 7507.1
  Top Layer w10: U2.9 2657.25,1913.55 2657.25,1408.78 2652.41,1403.94 2453.94,1403.94 U4.1 2290,1060 3169,1060 3229,1120 3229,3207 3602,3580 3788,3580 3808,3600 3808,3680 3988,3860 3988,4005.7 U6.2
  Bottom Layer w10: U6.2 4050.1,4343.8 5381.2,4343.8 U12.8
NetU2_11: U2.11 U4.10 | length 566.6
  Top Layer w10: U2.11 2462,1918.3 2462,1600.6 U4.10
NetU3_2: U3.2 U3.6 U3.12 | length 784.9
  Top Layer w10: U3.2 4000,1743.7 U3.12
  Bottom Layer w10: U3.2 3937.3,1681 4262.7,1681 U3.6
NetU3_3: U3.3 U3.4 U3.10 | length 454
  Top Layer w10: U3.4 4200,1743.7 U3.10
  Bottom Layer w10: U3.3 U3.4
NetU3_8: U3.8 U4.12 | length 2405
  Bottom Layer w10: U4.12 2490.95,1553.55 4339.57,1553.55 4357.25,1571.22 4357.25,1913.55 U3.8
NetU3_9: U3.9 U8.2 U14.2 U14.8 | length 3771
  Top Layer w10: U8.2 3947,3053 4247,3053 4300,3000 U3.9
  Bottom Layer w10: U8.2 3803,3103 3720,3103 3700,3123 3700,3191 3759,3250 4962.6,3250 U14.2 5251.6,3539 5439,3539 U14.8
NetU3_11: U3.11 U4.13 | length 2004.5
  Bottom Layer w10: U4.13 2423.86,1586.45 3638.45,1586.45 3971,1919 4062.7,1919 U3.11
NetU4_2: U4.2 U6.1 U12.9 | length 6618.8
  Top Layer w10: U4.2 2370,1080 2830,1080 2932,1182 2932,3715 3112,3895 3241,3895 3536,3600 3768,3600 3788,3620 3788,4105.7 U6.1
  Bottom Layer w10: U6.1 3970.1,4363.8 5301.2,4363.8 U12.9
NetU4_3: U4.3 U4.5 | length 231.5
  Bottom Layer w10: U4.3 2438,1112 2562,1112 U4.5
NetU4_6: U4.6 U11.2 U11.3 U12.2 U12.3 | length 5777.2
  Top Layer w10: U4.6 2738,1112 2820,1112 2907,1199 2907,3818 v1(3169,4080) ; U12.2 5038,4188 5038,4549.4 U11.2
  Bottom Layer w10: v1(3169,4080) 4930,4080 U12.2 U12.3 ; U11.2 U11.3
NetU4_8: U4.8 U13.14 | length 4522.7
  Top Layer w10: U4.8 2762.75,1499.84 2762.75,1668.75 2838,1744 2838,2098 2810,2126 v1(2810,3713)
  Bottom Layer w10: v1(2810,3713) 3641,3713 3802,3874 4761.4,3874 U13.14
NetU4_11: U4.11 U15.14 | length 4073
  Top Layer w10: v1(4761,1628) 4761,3011 U15.14
  Bottom Layer w10: U4.11 2563.4,1526 4086.75,1526 4112.75,1500 4112.75,1440 4133.7,1419.05 4166.05,1419.05 4189,1442 4189,1510.55 4192,1513.55 4646.55,1513.55 v1(4761,1628)
NetU5_1: U5.1 U11.9 | length 1776.9
  Bottom Layer w10: U5.1 3807.25,4650.95 5150.95,4650.95 U11.9
NetU5_2: U5.2 U11.8 | length 1776.9
  Bottom Layer w10: U5.2 3887.25,4630.95 5230.95,4630.95 U11.8
NetU5_6: U5.6 U11.11 U12.14 | length 1989
  Bottom Layer w10: U5.6 4329.7,4514 4848.6,4514 U12.14 4970.4,4533 5305,4533 5350,4578 5350,4692 5538,4880 5538,4920 5513,4945 5245,4945 U11.11
NetU5_7: U5.7 U11.1 U11.12 | length 1762.4
  Top Layer w10: U5.7 4312,4631.7 4312,4924 4360,4972 5028,4972 U11.12
  Bottom Layer w10: U5.7 4387.7,4556 4868.6,4556 U11.1
NetU6_6: U6.6 U12.11 | length 1917.4
  Top Layer w10: U6.6 4400,4293.7 4400,4694 4511,4805 4511,4934 4527,4950 4920,4950 4950,4920 4950,4889 5150,4689 5150,4512.6 U12.11
NetU6_7: U6.7 U12.1 U12.12 | length 1895.1
  Bottom Layer w10: U6.7 4387.7,4106 4856,4106 U12.1 4959,4209 5300,4209 5538,4447 5538,4480 5518,4500 5350,4500 5338,4440 5323,4425 5137.6,4425 U12.12
NetU7_1: U7.1 U13.9 | length 1800.2
  Bottom Layer w10: U7.1 3929.16,3829.16 5216.57,3829.16 U13.9
NetU7_2: U7.2 U13.8 | length 1800.2
  Bottom Layer w10: U7.2 3982,3782 5269.4,3782 U13.8
NetU7_6: U7.6 U13.11 U14.14 | length 2183.4
  Bottom Layer w10: U7.6 4287.25,3687.25 4481.75,3687.25 4569,3600 U14.14 4900,3620 4950,3670 4950,3720 4977,3747 5305,3747 5538,3980 5538,4180 5514,4204 5382,4204 5338,4160 5338,4129 5277,4068 5255.4,4068 U13.11
NetU7_7: U7.7 U13.1 U13.12 | length 1994.6
  Top Layer w10: U13.1 v1(4900,3870)
  Bottom Layer w10: U7.7 4279,3579 3960,3579 3912,3627 3912,3670 3984,3742 4858,3742 U13.1 ; v1(4900,3870) 4957.4,3870 U13.12
NetU8_1: U8.1 U14.3 U14.9 | length 2189.6
  Bottom Layer w10: U8.1 3829.56,3229.56 5042.16,3229.56 U14.3 5296.6,3484 5480,3484 5538,3542 5538,3620 5520,3638 5438,3638 U14.9
NetU8_6: U8.6 U14.11 | length 1379.9
  Top Layer w10: v1(5150,3188) 5150,3550 U14.11
  Bottom Layer w10: U8.6 4288,3112 4492,3112 4568,3188 v1(5150,3188)
NetU8_7: U8.7 U14.1 U14.12 | length 1079
  Top Layer w10: U8.7 4350,3280.8 4356.6,3287.4
  Bottom Layer w10: 4356.6,3287.4 U14.1 4900,3400 U14.12
NetU9_1: U9.1 U15.9 | length 2590.1
  Bottom Layer w10: U9.1 3787.7,2606 3874,2606 3900,2632 3900,2668 3983.55,2751.55 5006.45,2751.55 5038,2720 5038,2704 5080,2662 5520,2662 5538,2680 5538,3170 5520,3188 5438,3188 U15.9
NetU9_2: U9.2 U15.2 U15.8 U16.2 | length 2346
  Top Layer w10: U16.2 5038,2425.4 5038,2749 5000,2787 U15.2
  Bottom Layer w10: U9.2 3878.15,2671.85 3878.15,2680 3988.15,2790 4952.6,2790 U15.2 5148.6,2986 5336,2986 U15.8
NetU9_6: U9.6 U15.11 U16.1 | length 2649.1
  Top Layer w10: v1(4950,2643) 4950,2437.4 U16.1 5109,2178.4 5109,2080 5149,2040 5198,2040 5238,2080 5238,3112 U15.11
  Bottom Layer w10: U9.6 4287.7,2606 4473,2606 4510,2643 v1(4950,2643)
NetU9_7: U9.7 U15.1 U15.12 | length 1337.8
  Top Layer w10: U9.7 4350,2797 4494,2941 4494,3034 4500,3040
  Bottom Layer w10: 4500,3040 4697.4,3040 U15.1 4900,2950 U15.12
NetU10_1: U10.1 U15.3 U16.3 U16.8 | length 2420.5
  Top Layer w10: U16.3 5138,2425.4 5138,2799.4 U15.3
  Bottom Layer w10: U10.1 3852.3,2246 4376.8,2246 4555.8,2425 5062.4,2425 U16.3 ; U15.3 5168.4,2769 5431,2769 U16.8
NetU10_2: U10.2 U16.11 | length 1965.6
  Top Layer w10: v1(5162,2086) 5162,2662 U16.11
  Bottom Layer w10: U10.2 3907.7,2086 v1(5162,2086)
NetU10_7: U10.7 U16.9 | length 1554.5
  Top Layer w10: v1(5350,2274) 5438,2362 5438,2662 U16.9
  Bottom Layer w10: U10.7 4507.3,2301 5323,2301 v1(5350,2274)
NetU11_14: U11.14 U16.12 | length 2282.8
  Top Layer w10: U11.14 4938,4862 4938,3889.16 5043,3784.16 5043,2787 5100,2730 U16.12
VCC: C1.1 C2.1 C3.1 C4.1 C5.1 C6.1 C7.1 C8.1 C9.1 C10.1 C11.1 C12.1 C13.1 C14.1 C15.1 C16.1 C17.1 P1.1 R1.1 R2.1 R3.1 R4.1 R5.1 U1.16 U2.14 U3.14 U4.14 U5.3 U5.5 U5.16 U6.3 U6.5 U6.16 U7.3 U7.5 U7.16 U8.16 U9.16 U10.3 U10.16 U11.5 U12.5 U13.5 U14.5 U15.5 U16.5 U17.13 U17.14 U18.13 U18.14 U19.13 U19.14 | length 25328.6
  Top Layer w10: U18.13 U18.14 1863,3087 1863,3573 1892,3602 1892,3879 1863,3908 1863,4313 U17.13 U17.14 ; U19.13 U19.14 ; U4.14 2162,1500.6 2162,1918.3 U2.14 ; C6.1 3512,3902.94 3512,3834.77 3534.41,3812.36 3588,3812.36 3626,3850.36 3626,4171 3680,4225 3868.7,4225 U6.3 ; U1.16 3750,1906.3 U3.14 3950,2106.3 U10.3 3950,2256.3 U10.16 3656.3,2550 C8.1 3750,2840.94 U9.16 3712,2994.3 3712,3128.94 C7.1 3578.35,3290.94 U8.16 3829.6,3383 4131,3383 4188,3440 4188,3612 U7.5 4188,3688 4188,4105.7 U6.5 4150,4319 4207.25,4376.25 4207.25,4536.45 U5.5 ; U6.16 3712,4494.3 3712,4868.3 U5.16 ; C16.1 4638,1088 4638,1662 C15.1 4638,1738 4638,2312 C14.1 4638,2388 4638,2962 C13.1 4638,3038 4638,3612 C12.1 ; U16.5 5338,2425.4 5338,2799.4 U15.5 5338,2875.4 5338,3249.4 U14.5 5338,3325.4 5338,3662 U13.5 5338,3738 5338,4112 U12.5 5338,4188 5338,4549.4 U11.5 ; R1.1 6564.96,2085.04 P1.1
  Bottom Layer w10: U18.13 1863,2913 1863,2828 1880,2811 2356,2811 2395,2772 2395,2633 2420,2608 2780,2608 2792,2620 2792,2667 2840,2715 3075.94,2715 C3.1 C8.1 ; U19.13 2007.4,1462.6 U4.14 ; U2.14 2281.7,2038 3102.94,2038 C4.1 3340.94,1990.94 C9.1 3756.3,2000 U3.14 ; C5.1 3359.06,1350 C10.1 3643.7,1350 U1.16 ; C2.1 C7.1 ; C1.1 C6.1 3728.35,3940.94 U7.16 ; U6.16 3818.7,4525 3881.3,4525 U5.3 3987.7,4556 4112.3,4556 U5.5 ; U7.3 3988,3612 4112,3612 U7.5 4207.25,3707.25 4542.75,3707.25 C12.1 ; U6.3 3987.7,4106 4112.3,4106 U6.5 4243.3,4237 4546.06,4237 C11.1 ; C14.1 5262.6,2350 U16.5 5537.4,2150 R3.1 R2.1 R1.1 ; U14.5 5359.6,3347 6197,3347 R5.1 R4.1 ; C17.1 6288.98,1300 P1.1
pads on no net: D1.A D1.C D2.A D2.C D3.A D3.C D4.A D4.C RP1.8 RP1.9 RP6.8 RP6.9 SW1.3 U1.1 U1.2 U1.4 U1.5 U1.6 U1.7 U1.9 U1.13 U1.14 U1.15 U5.4 U6.4 U7.4 U8.4 U9.4 U10.4 U11.4 U11.13 U12.4 U12.13 U13.4 U13.13 U14.4 U14.13 U15.4 U15.13 U16.4 U16.13 U17.4 U17.9 U18.4 U18.9 U19.4 U19.9